# EAGLE board MZMFC v8 (EAGLE 9.7.0), part 1 of 2
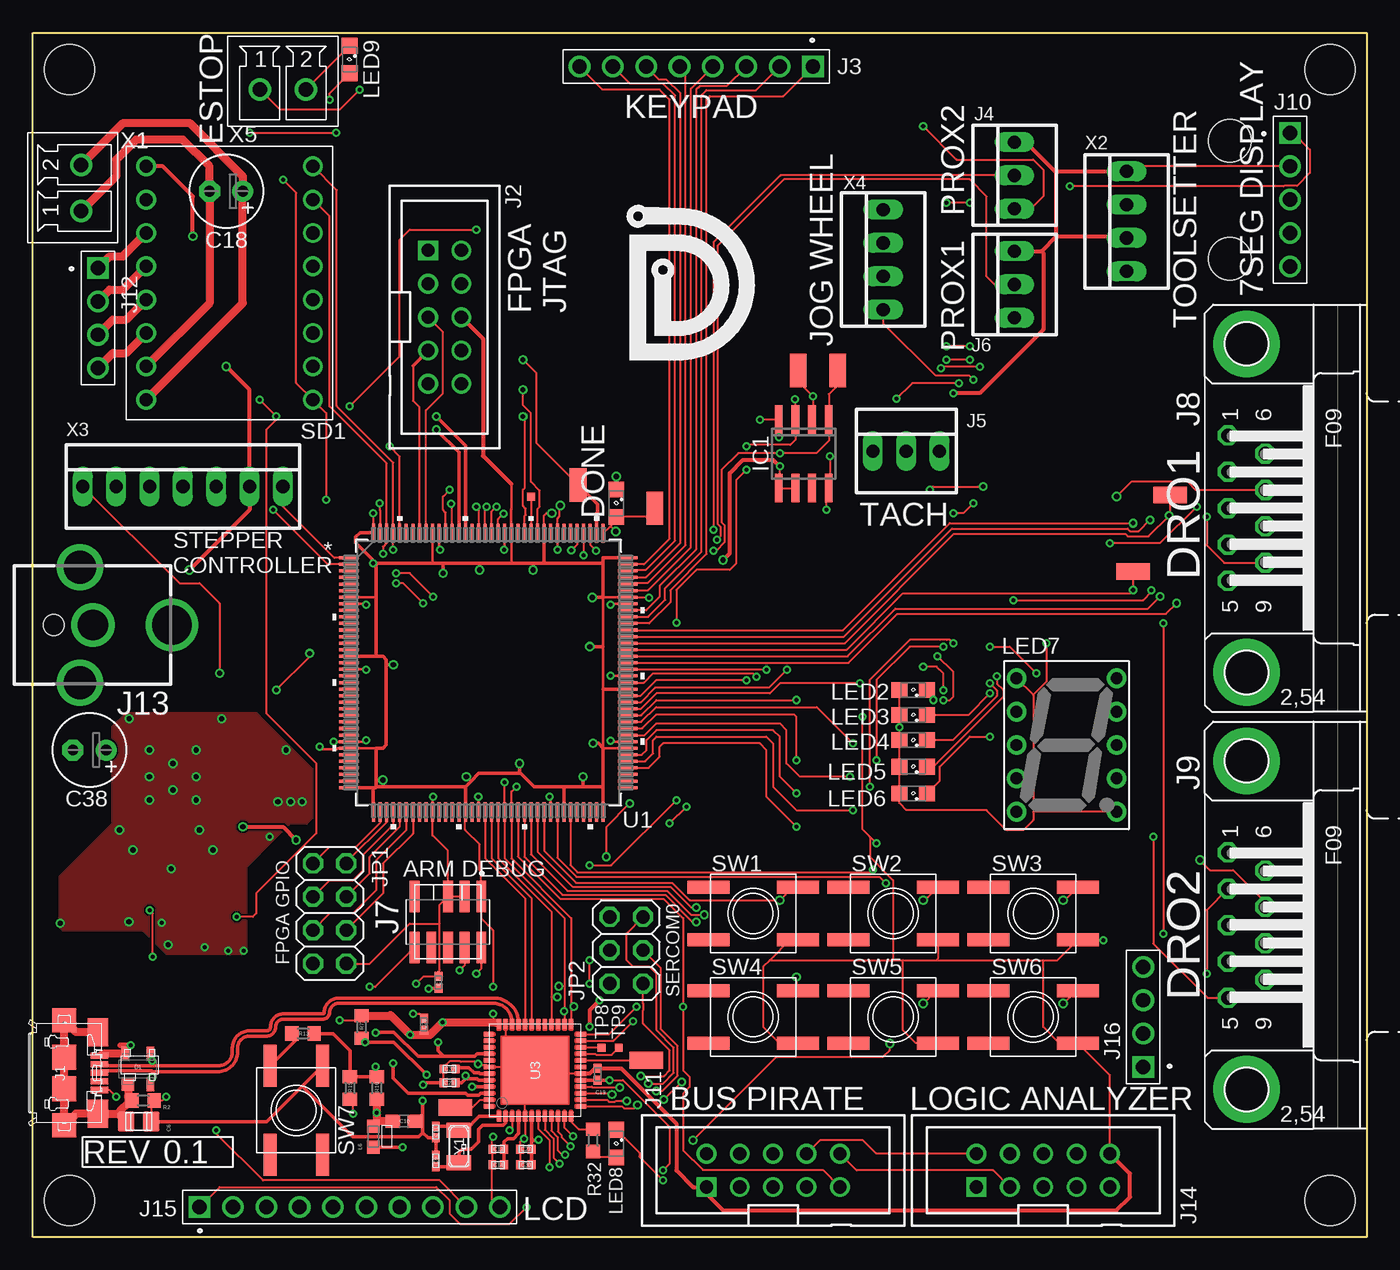
[diagram p0: board, top side]
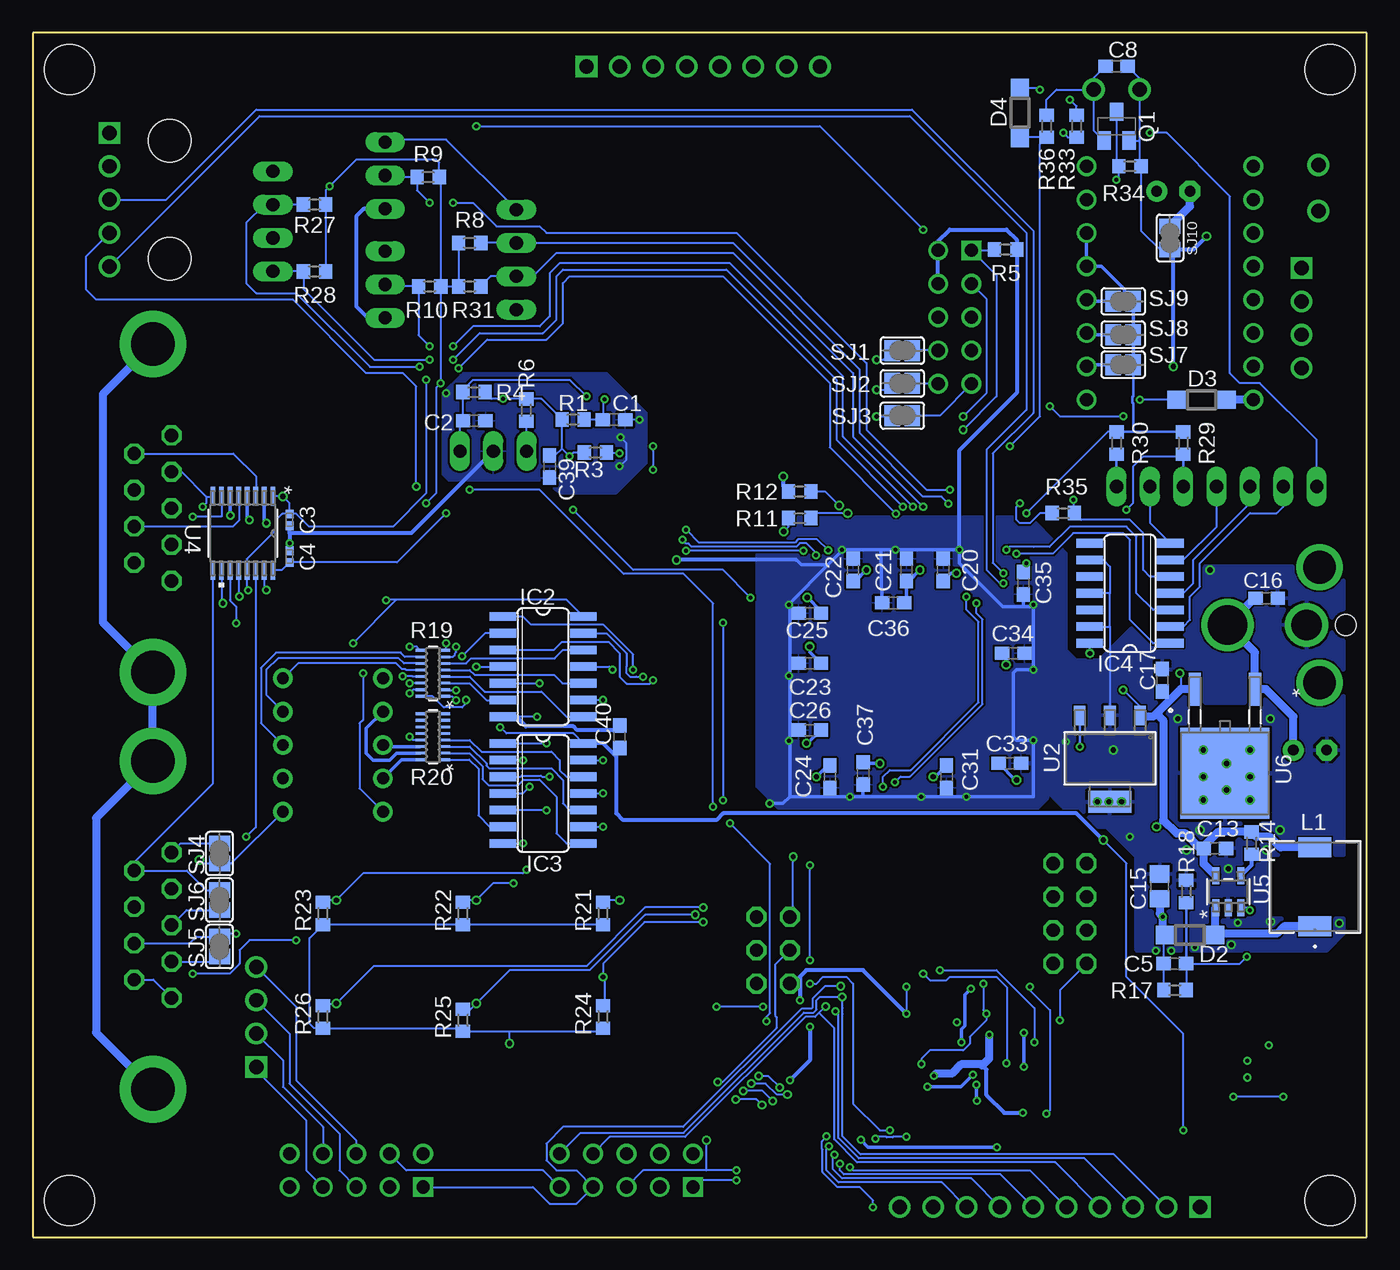
[diagram p1: board, bottom side, seen from below]

Size 101.6 x 91.69 mm. Coordinates in mm from the lower left corner, seen from the top.
Outline: 0,0 0,91.69 101.6,91.69 101.6,0 0,0
Copper layers (1*16): Top 0.035mm / dielectric 1.5mm / Bottom 0.035mm
Design rules "SeeedStudio_2layers *": minimum track width 6mil, minimum drill 12mil, track to track 6mil, track to pad 6mil, pad to pad 6mil, via to via 6mil, smd to smd 0mil, copper to edge 10mil, drill to drill 10mil, minimum pad ring 10mil, minimum via ring 6mil, stop-mask expansion 2mil, vias tented up to drill 100mil, thermal gap 8mil
Net classes: 0 default: width 0.152 mm, drill 0.25 mm
Holes 3.81 mm at 2.79,2.79 98.81,2.79 2.79,88.9 98.81,88.9
Holes 3.25 mm at 91.19,83.49 91.19,74.5
tRestrict: 1 lines

## Footprints (pad centres in the part's own frame; a part is rotated, then mirrored left to right if it is on the bottom)
C0603 = smd 1.1 x 1: 1 -0.85,0; 2 0.85,0
0402-1005X55N = smd 0.62 x 0.62: 1 -0.45,0; 2 0.45,0
C0805 = smd 1.5 x 1.25: 1 0,0.95; 2 0,-0.95
C0805' = smd 1.3 x 1.5: 1 -0.95,0; 2 0.95,0
E2,5-6 = drill 0.813 pad 1.6: + -1.27,0 | drill 0.813 pad 1.6 octagon: - 1.27,0
SOT190P230X110-4N = smd 1 x 1: 1 -1.15,0.75 | smd 1 x 0.6: 2 -1.15,-0.95; 3 1.15,-0.95; 4 1.15,0.95
SOD123 = smd 1.4 x 1.4: A 1.9,0; C -1.9,0
SO08 = smd 0.6 x 2.2: 1 -1.905,-2.6; 2 -0.635,-2.6; 3 0.635,-2.6; 4 1.905,-2.6; 5 1.905,2.6; 6 0.635,2.6; 7 -0.635,2.6; 8 -1.905,2.6
SO14 = smd 0.66 x 2.032: 1 -3.81,-3.073; 2 -2.54,-3.073; 3 -1.27,-3.073; 4 0,-3.073; 5 1.27,-3.073; 6 2.54,-3.073; 7 3.81,-3.073; 8 3.81,3.073; 9 2.54,3.073; 10 1.27,3.073; 11 0,3.073; 12 -1.27,3.073; 13 -2.54,3.073; 14 -3.81,3.073
USBMICRO-ZX62-AB-5PA = smd 0.4 x 1.35: 1 -1.3,3.025; 2 -0.65,3.025; 3 0,3.025; 4 0.65,3.025; 5 1.3,3.025 | smd 2.1 x 1.6: 6 3.1,2.9; 11 -3.1,2.9 | smd 1.8 x 1.9: 7 4,0.35; 10 -4,0.35 | smd 1.9 x 1.9: 8 1.2,0.35; 9 -1.2,0.35
PAK100/2500-10 = drill 1 pad 1.422 square: 1 -5.08,-1.27 | drill 1 pad 1.422: 2 -5.08,1.27; 3 -2.54,-1.27; 4 -2.54,1.27; 5 0,-1.27; 6 0,1.27; 7 2.54,-1.27; 8 2.54,1.27; 9 5.08,-1.27; 10 5.08,1.27
61300811121 = drill 1.1 square: 1 -8.89,0 | drill 1.1: 2 -6.35,0; 3 -3.81,0; 4 -1.27,0; 5 1.27,0; 6 3.81,0; 7 6.35,0; 8 8.89,0
22-23-2031 = drill 1 long: 1 -2.54,0; 2 0,0; 3 2.54,0
FTSH-105-01-F-DV-007-K = smd 0.75 x 2.4: 1 -2.54,-1.95; 2 -2.54,1.95; 3 -1.27,-1.95; 4 -1.27,1.95; 5 0,-1.95; 6 0,1.95; 8 1.27,1.95; 9 2.54,-1.95; 10 2.54,1.95
F09HP = drill 1.016 octagon: 1 -5.54,-1.42; 2 -2.77,-1.42; 3 0,-1.42; 4 2.77,-1.42; 5 5.54,-1.42; 6 -4.155,1.42; 7 -1.385,1.42; 8 1.385,1.42; 9 4.155,1.42 | drill 3.302 pad 5.08: G1 -12.495,0; G2 12.495,0
61300511121 = drill 1.1 square: 1 -5.08,0 | drill 1.1: 2 -2.54,0; 3 0,0; 4 2.54,0; 5 5.08,0
61300411121 = drill 1.1 square: 1 -3.81,0 | drill 1.1: 2 -1.27,0; 3 1.27,0; 4 3.81,0
PJ-063AH = drill 3: + 0,-5 | drill 2.3: - 0,1 | drill 2.5: P$2 -4.4,2; P$3 4.4,2 | hole 1.6: 0,4
61301011121 = drill 1.1 square: 1 -11.43,0 | drill 1.1: 2 -8.89,0; 3 -6.35,0; 4 -3.81,0; 5 -1.27,0; 6 1.27,0; 7 3.81,0; 8 6.35,0; 9 8.89,0; 10 11.43,0
2X04 = drill 1.016 octagon: 1 -3.81,-1.27; 2 -3.81,1.27; 3 -1.27,-1.27; 4 -1.27,1.27; 5 1.27,-1.27; 6 1.27,1.27; 7 3.81,-1.27; 8 3.81,1.27
2X03 = drill 1.016 octagon: 1 -2.54,-1.27; 2 -2.54,1.27; 3 0,-1.27; 4 0,1.27; 5 2.54,-1.27; 6 2.54,1.27
IND_BOURNS_SRR0604 = smd 1.524 x 2.515: 1 -3.01,0; 2 3.01,0
0603-1608X90N = smd 0.95 x 1: 1 -0.8,0; 2 0.8,0
SML0805 = smd 1.2 x 1.2: A 1.05,0; C -1.05,0
LA-401 = drill 0.9 pad 1.5: 1 -3.81,5.08; 2 -3.81,2.54; 3 -3.81,0; 4 -3.81,-2.54; 5 -3.81,-5.08; 6 3.81,-5.08; 7 3.81,-2.54; 8 3.81,0; 9 3.81,2.54; 10 3.81,5.08
SOT23-BEC = smd 1 x 1.4: B -0.95,-1.1; C 0,1.1; E 0.95,-1.1
R0603 = smd 1 x 1.1: 1 -0.85,0; 2 0.85,0
EXB2HV = smd 0.686 x 0.203: 1 -0.965,1.75; 2 -0.965,1.25; 3 -0.965,0.75; 4 -0.965,0.25; 5 -0.965,-0.25; 6 -0.965,-0.75; 7 -0.965,-1.25; 8 -0.965,-1.75; 9 0.965,-1.75; 10 0.965,-1.25; 11 0.965,-0.75; 12 0.965,-0.25; 13 0.965,0.25; 14 0.965,0.75; 15 0.965,1.25; 16 0.965,1.75
STEPPER_DRIVER = drill 1: P0 -6.35,8.89; P1 -6.35,6.35; P2 -6.35,3.81; P3 -6.35,1.27; P4 -6.35,-1.27; P5 -6.35,-3.81; P6 -6.35,-6.35; P7 -6.35,-8.89; P8 6.35,-8.89; P9 6.35,-6.35; P10 6.35,-3.81; P11 6.35,-1.27; P12 6.35,1.27; P13 6.35,3.81; P14 6.35,6.35; P15 6.35,8.89
SJ = smd 1.168 x 1.6: 1 -0.762,0; 2 0.762,0
SJ_DEFAULT = smd 1.168 x 1.6: 1 -0.889,0; 2 0.889,0
EVQQ2* = smd 3.2 x 1: A -3.4,-2; A' 3.4,-2; B -3.4,2; B' 3.4,2
TESTPOINT_RCT_0805 = smd 2.54 x 1.27: P$1 0,0
TP06SQ = smd 0.6 x 0.6: TP 0,0
TQFP144 = smd 1.473 x 0.229: 1 -10.617,8.75; 2 -10.617,8.25; 3 -10.617,7.75; 4 -10.617,7.25; 5 -10.617,6.75; 6 -10.617,6.25; 7 -10.617,5.75; 8 -10.617,5.25; 9 -10.617,4.75; 10 -10.617,4.25; 11 -10.617,3.75; 12 -10.617,3.25; 13 -10.617,2.75; 14 -10.617,2.25; 15 -10.617,1.75; 16 -10.617,1.25; 17 -10.617,0.75; 18 -10.617,0.25; 19 -10.617,-0.25; 20 -10.617,-0.75; 21 -10.617,-1.25; 22 -10.617,-1.75; 23 -10.617,-2.25; 24 -10.617,-2.75; 25 -10.617,-3.25; 26 -10.617,-3.75; 27 -10.617,-4.25; 28 -10.617,-4.75; 29 -10.617,-5.25; 30 -10.617,-5.75; 31 -10.617,-6.25; 32 -10.617,-6.75; 33 -10.617,-7.25; 34 -10.617,-7.75; 35 -10.617,-8.25; 36 -10.617,-8.75; 73 10.617,-8.75; 74 10.617,-8.25; 75 10.617,-7.75; 76 10.617,-7.25; 77 10.617,-6.75; 78 10.617,-6.25; 79 10.617,-5.75; 80 10.617,-5.25; 81 10.617,-4.75; 82 10.617,-4.25; 83 10.617,-3.75; 84 10.617,-3.25; 85 10.617,-2.75; 86 10.617,-2.25; 87 10.617,-1.75; 88 10.617,-1.25; 89 10.617,-0.75; 90 10.617,-0.25; 91 10.617,0.25; 92 10.617,0.75; 93 10.617,1.25; 94 10.617,1.75; 95 10.617,2.25; 96 10.617,2.75; 97 10.617,3.25; 98 10.617,3.75; 99 10.617,4.25; 100 10.617,4.75; 101 10.617,5.25; 102 10.617,5.75; 103 10.617,6.25; 104 10.617,6.75; 105 10.617,7.25; 106 10.617,7.75; 107 10.617,8.25; 108 10.617,8.75 | smd 0.229 x 1.473: 37 -8.75,-10.617; 38 -8.25,-10.617; 39 -7.75,-10.617; 40 -7.25,-10.617; 41 -6.75,-10.617; 42 -6.25,-10.617; 43 -5.75,-10.617; 44 -5.25,-10.617; 45 -4.75,-10.617; 46 -4.25,-10.617; 47 -3.75,-10.617; 48 -3.25,-10.617; 49 -2.75,-10.617; 50 -2.25,-10.617; 51 -1.75,-10.617; 52 -1.25,-10.617; 53 -0.75,-10.617; 54 -0.25,-10.617; 55 0.25,-10.617; 56 0.75,-10.617; 57 1.25,-10.617; 58 1.75,-10.617; 59 2.25,-10.617; 60 2.75,-10.617; 61 3.25,-10.617; 62 3.75,-10.617; 63 4.25,-10.617; 64 4.75,-10.617; 65 5.25,-10.617; 66 5.75,-10.617; 67 6.25,-10.617; 68 6.75,-10.617; 69 7.25,-10.617; 70 7.75,-10.617; 71 8.25,-10.617; 72 8.75,-10.617; 109 8.75,10.617; 110 8.25,10.617; 111 7.75,10.617; 112 7.25,10.617; 113 6.75,10.617; 114 6.25,10.617; 115 5.75,10.617; 116 5.25,10.617; 117 4.75,10.617; 118 4.25,10.617; 119 3.75,10.617; 120 3.25,10.617; 121 2.75,10.617; 122 2.25,10.617; 123 1.75,10.617; 124 1.25,10.617; 125 0.75,10.617; 126 0.25,10.617; 127 -0.25,10.617; 128 -0.75,10.617; 129 -1.25,10.617; 130 -1.75,10.617; 131 -2.25,10.617; 132 -2.75,10.617; 133 -3.25,10.617; 134 -3.75,10.617; 135 -4.25,10.617; 136 -4.75,10.617; 137 -5.25,10.617; 138 -5.75,10.617; 139 -6.25,10.617; 140 -6.75,10.617; 141 -7.25,10.617; 142 -7.75,10.617; 143 -8.25,10.617; 144 -8.75,10.617
SOT-223_3MC = smd 0.889 x 1.473: 1 -2.3,-3.269; 2 0,-3.269; 3 2.3,-3.269 | smd 3.302 x 1.676: 4 0,3.302
QFN50P700X700X90-49XN-EPSQ515 = smd 0.65 x 0.28: 1 -3.525,2.75; 2 -3.525,2.25; 3 -3.525,1.75; 4 -3.525,1.25; 5 -3.525,0.75; 6 -3.525,0.25; 7 -3.525,-0.25; 8 -3.525,-0.75; 9 -3.525,-1.25; 10 -3.525,-1.75; 11 -3.525,-2.25; 12 -3.525,-2.75; 25 3.525,-2.75; 26 3.525,-2.25; 27 3.525,-1.75; 28 3.525,-1.25; 29 3.525,-0.75; 30 3.525,-0.25; 31 3.525,0.25; 32 3.525,0.75; 33 3.525,1.25; 34 3.525,1.75; 35 3.525,2.25; 36 3.525,2.75 | smd 0.28 x 0.65: 13 -2.75,-3.525; 14 -2.25,-3.525; 15 -1.75,-3.525; 16 -1.25,-3.525; 17 -0.75,-3.525; 18 -0.25,-3.525; 19 0.25,-3.525; 20 0.75,-3.525; 21 1.25,-3.525; 22 1.75,-3.525; 23 2.25,-3.525; 24 2.75,-3.525; 37 2.75,3.525; 38 2.25,3.525; 39 1.75,3.525; 40 1.25,3.525; 41 0.75,3.525; 42 0.25,3.525; 43 -0.25,3.525; 44 -0.75,3.525; 45 -1.25,3.525; 46 -1.75,3.525; 47 -2.25,3.525; 48 -2.75,3.525 | smd 5 x 5: 49 0,0
TSSOP-16 = smd 1.473 x 0.356: 1 -2.819,2.275; 2 -2.819,1.625; 3 -2.819,0.975; 4 -2.819,0.325; 5 -2.819,-0.325; 6 -2.819,-0.975; 7 -2.819,-1.625; 8 -2.819,-2.275; 9 2.819,-2.275; 10 2.819,-1.625; 11 2.819,-0.975; 12 2.819,-0.325; 13 2.819,0.325; 14 2.819,0.975; 15 2.819,1.625; 16 2.819,2.275
MF05A = smd 1.27 x 0.559: 1 -1.219,0.953; 2 -1.219,0; 3 -1.219,-0.953; 4 1.219,-0.953; 5 1.219,0.953
DPAK-3 = smd 0.94 x 2.489: 1 -2.29,-6.413; 3 2.29,-6.413 | smd 6.782 x 6.934: 2 0,0
HDR_TERMBLK_3.5_2 = drill 1.1 pad 1.7: 1 -1.75,0; 2 1.75,0
22-23-2041 = drill 1 long: 1 -3.81,0; 2 -1.27,0; 3 1.27,0; 4 3.81,0
22-23-2071 = drill 1 long: 1 -7.62,0; 2 -5.08,0; 3 -2.54,0; 4 0,0; 5 2.54,0; 6 5.08,0; 7 7.62,0
QUARZO-ABS07 = smd 1.1 x 1.9: 1 -1.25,0; 2 1.25,0

## Placement (x,y rotation side)
C1  0.1u  [C0603]  57.33,62.24 0 bottom
C2  0.1u  [C0603]  67.98,62.15 0 bottom
C3  100nF  [0402-1005X55N]  82.04,54.61 270 bottom
C4  100nF  [0402-1005X55N]  82.04,51.82 90 bottom
C5  220p  [C0603]  14.61,20.83 180 bottom
C6  4.7nF  [C0805]  8.06,8.8 90 top
C7  100nF  [0402-1005X55N]  30.9,19.4 90 top
C8  0.1u  [C0603]  19.05,89.15 0 bottom
C9  20pF  [0402-1005X55N]  30.7,5.8 270 top
C10  1uF  [C0603]  28.26,8.83 0 top
C11  20pF  [0402-1005X55N]  30.7,8 90 top
C12  4.7uF  [0402-1005X55N]  35.45,6.7 180 top
C13  2.2u  [C0603]  11.56,29.59 0 bottom
C14  100nF  [0402-1005X55N]  35.45,5.5 180 top
C15  4.7u  [C0805']  15.77,26.7 270 bottom
C16  1uF  [C0603]  7.62,48.64 0 bottom
C17  1uF  [C0603]  15.57,42.39 90 bottom
C18  100u  [E2,5-6]  14.73,79.63 180 top
C19  100nF  [0402-1005X55N]  43.03,12.4 90 top
C20  0.1u  [C0603]  32.26,50.8 90 bottom
C21  0.01u  [C0603]  35.05,50.8 90 bottom
C22  0.1u  [C0603]  39.12,50.8 90 bottom
C23  0.1u  [C0603]  42.42,43.69 180 bottom
C24  0.1u  [C0603]  40.89,35.05 270 bottom
C25  0.01u  [C0603]  42.42,47.5 180 bottom
C26  0.01u  [C0603]  42.42,38.61 180 bottom
C27  4.7uF  [0402-1005X55N]  37.55,6.7 180 top
C28  100nF  [0402-1005X55N]  31.75,11.75 180 top
C29  100nF  [0402-1005X55N]  29.8,16.2 90 top
C30  100nF  [0402-1005X55N]  37.55,5.5 180 top
C31  0.01u  [C0603]  32,35.05 270 bottom
C32  1uF  [0402-1005X55N]  31.75,12.8 180 top
C33  0.1u  [C0603]  27.18,36.07 0 bottom
C34  0.01u  [C0603]  26.92,44.45 0 bottom
C35  0.1u  [C0603]  26.16,49.78 270 bottom
C36  10u  [C0603]  36.07,48.29 180 bottom
C37  1u  [C0603]  38.35,35.31 270 bottom
C38  100u  [E2,5-6]  4.32,37.08 180 top
C39  0.1u  [C0603]  62.23,58.67 270 bottom
C40  0.1u  [C0603]  56.9,38.1 90 bottom
D1  PRTR5V0U2X,215  [SOT190P230X110-4N]  8,12.8 90 top
D2  1N5819HW  [SOD123]  13.46,22.99 0 bottom
D3  1N5819HW  [SOD123]  12.57,63.75 0 bottom
D4  MMSZ5225B-7-F  [SOD123]  26.42,85.6 90 bottom
FRAME1  [REVISION]  9.65,5.33 0 top
IC1  LM393D  [SO08]  58.72,59.63 180 top
IC2  74LS06D  [SO14]  62.74,43.43 270 bottom
IC3  74LS06D  [SO14]  62.74,33.78 270 bottom
IC4  74LS06D  [SO14]  18.03,49.02 90 bottom
J1  ZX62-AB-5PA(31)  [USBMICRO-ZX62-AB-5PA]  2.05,12.5 270 top
J2  302-S101  [PAK100/2500-10]  31.37,70.05 270 top
J3  61300811121  [61300811121]  50.53,89.12 180 top
J4  22-23-2031  [22-23-2031]  74.77,80.83 90 top
J5  22-23-2031  [22-23-2031]  66.53,59.85 0 top
J6  22-23-2031  [22-23-2031]  74.77,72.53 90 top
J7  FTSH-105-01-F-DV-007-K  [FTSH-105-01-F-DV-007-K]  31.62,24 180 top
J8  DB9F_RA  [F09HP]  92.46,55.5 270 top
J9  DB9F_RA  [F09HP]  92.46,23.75 270 top
J10  61300511121  [61300511121]  95.76,78.99 270 top
J11  302-S101  [PAK100/2500-10]  56.39,5.08 0 top
J12  61300411121  [61300411121]  4.95,69.98 270 top
J13  PJ-063AH  [PJ-063AH]  5.59,46.61 90 top
J14  302-S101  [PAK100/2500-10]  76.96,5.08 0 top
J15  61301011121  [61301011121]  24.13,2.29 0 top
J16  61300411121  [61300411121]  84.58,16.76 90 top
JP1  [2X04]  22.61,24.64 270 top
JP2  [2X03]  45.21,21.84 90 top
L1  SRR0604-100ML  [IND_BOURNS_SRR0604]  3.94,26.67 90 bottom
L6  BLM18PG471SN1D  [0603-1608X90N]  25.93,7.64 270 top
LED1  [SML0805]  44.45,55.88 270 top
LED2  [SML0805]  67.06,41.66 180 top
LED3  [SML0805]  67.06,39.75 180 top
LED4  [SML0805]  67.06,37.85 180 top
LED5  [SML0805]  67.06,35.81 180 top
LED6  [SML0805]  67.06,33.78 180 top
LED7  LA-401AD  [LA-401]  78.74,37.47 0 top
LED8  [SML0805]  44.45,7.11 270 top
LED9  [SML0805]  24.13,89.66 270 top
Q1  *3904  [SOT23-BEC]  19.05,84.58 0 bottom
R1  10k  [R0603]  60.45,62.25 180 bottom
R2  1M  [R0603]  8.41,10.4 180 top
R3  10k  [R0603]  58.75,59.73 180 bottom
R4  10k  [R0603]  68,64.33 0 bottom
R5  4.7k  [R0603]  27.51,75.19 180 bottom
R6  470  [R0603]  64.02,62.97 90 bottom
R7  1K  [R0603]  25.05,16 90 top
R8  4.7k  [R0603]  68.33,75.69 0 bottom
R9  10k  [R0603]  71.49,80.71 0 bottom
R10  10k  [R0603]  71.37,72.39 0 bottom
R11  330  [R0603]  43.18,54.74 0 bottom
R12  330  [R0603]  43.18,56.77 180 bottom
R13  330R  [R0603]  20.58,15.5 0 top
R14  51k  [R0603]  8.76,30 90 bottom
R15  39R  [R0603]  24.16,11.35 90 top
R16  10K  [R0603]  26.2,11.35 270 top
R17  117k  [R0603]  14.61,18.8 180 bottom
R18  13.3k  [R0603]  13.74,26.31 90 bottom
R19  EXB-2HV221JV  [EXB2HV]  71.12,42.93 180 bottom
R20  EXB-2HV221JV  [EXB2HV]  71.12,38.1 180 bottom
R21  10k  [R0603]  58.17,24.64 90 bottom
R22  10k  [R0603]  68.83,24.64 90 bottom
R23  10k  [R0603]  79.5,24.64 90 bottom
R24  10k  [R0603]  58.17,16.76 90 bottom
R25  10k  [R0603]  68.83,16.51 90 bottom
R26  10k  [R0603]  79.5,16.76 90 bottom
R27  1k  [R0603]  80.14,78.61 0 bottom
R28  150  [R0603]  80.14,73.53 0 bottom
R29  4.7k  [R0603]  13.97,60.45 90 bottom
R30  4.7k  [R0603]  19.05,60.45 90 bottom
R31  4.7k  [R0603]  68.33,72.39 0 bottom
R32  470  [R0603]  42.67,7.37 270 top
R33  470  [R0603]  22.1,84.58 270 bottom
R34  10k  [R0603]  18.03,81.53 180 bottom
R35  470  [R0603]  23.11,55.12 0 bottom
R36  10k  [R0603]  24.38,84.58 90 bottom
SD1  [STEPPER_DRIVER]  14.99,72.64 180 top
SJ1  [SJ]  35.37,67.5 180 bottom
SJ2  [SJ]  35.37,65 180 bottom
SJ3  [SJ]  35.37,62.55 0 bottom
SJ4  [SJ]  87.38,29.21 90 bottom
SJ5  [SJ]  87.38,22.12 90 bottom
SJ6  [SJ]  87.38,25.65 90 bottom
SJ7  [SJ]  18.54,66.42 180 bottom
SJ8  [SJ]  18.54,68.71 180 bottom
SJ9  [SJ]  18.54,71.25 180 bottom
SJ10  SJ_DEFAULT  [SJ_DEFAULT]  14.99,76.07 270 bottom
SW1  PB_NO_EVQQ2  [EVQQ2*]  54.86,24.64 0 top
SW2  PB_NO_EVQQ2  [EVQQ2*]  65.53,24.64 0 top
SW3  PB_NO_EVQQ2  [EVQQ2*]  76.2,24.64 0 top
SW4  PB_NO_EVQQ2  [EVQQ2*]  54.86,16.76 0 top
SW5  PB_NO_EVQQ2  [EVQQ2*]  65.53,16.76 0 top
SW6  PB_NO_EVQQ2  [EVQQ2*]  76.2,16.76 0 top
SW7  PB_NO_EVQQ2  [EVQQ2*]  20.07,9.65 90 top
TP1  TESTPOINTRCT_0805  [TESTPOINT_RCT_0805]  61.32,65.99 90 top
TP2  TESTPOINTRCT_0805  [TESTPOINT_RCT_0805]  58.29,65.99 90 top
TP3  TESTPOINTRCT_0805  [TESTPOINT_RCT_0805]  41.53,57.28 90 top
TP4  TESTPOINTRCT_0805  [TESTPOINT_RCT_0805]  47.37,55.5 90 top
TP5  PTR1TP06SQ  [TP06SQ]  37.95,56.36 0 top
TP6  TESTPOINTRCT_0805  [TESTPOINT_RCT_0805]  86.61,56.52 0 top
TP7  TESTPOINTRCT_0805  [TESTPOINT_RCT_0805]  83.82,50.67 0 top
TP8  PTR1TP06SQ  [TP06SQ]  43.31,14.4 0 top
TP9  PTR1TP06SQ  [TP06SQ]  44.63,14.4 0 top
TP10  TESTPOINTRCT_0805  [TESTPOINT_RCT_0805]  32.18,9.86 0 top
TP12  TESTPOINTRCT_0805  [TESTPOINT_RCT_0805]  46.74,13.46 0 top
U1  LCMXO2-4000HC-4TG144C  [TQFP144]  34.7,42.97 0 top
U2  MCP1824ST-3302E/DB  [SOT-223_3MC]  19.56,36.45 180 bottom
U3  ATSAMD21G18A-48  [QFN50P700X700X90-49XN-EPSQ515]  38.25,12.7 90 top
U4  MC14504BDTR2G  [TSSOP-16]  85.6,53.59 270 bottom
U5  LMR62014XMFE/NOPB  [MF05A]  10.54,26.29 90 bottom
U6  MC78M05CDTRKG  [DPAK-3]  10.79,35.31 180 bottom
X1  HDR_TERMBLK_3.5_2  [HDR_TERMBLK_3.5_2]  3.68,79.88 90 top
X2  22-23-2041  [22-23-2041]  83.31,77.34 90 top
X3  22-23-2071  [22-23-2071]  11.43,57.15 0 top
X4  22-23-2041  [22-23-2041]  64.77,74.42 90 top
X5  HDR_TERMBLK_3.5_2  [HDR_TERMBLK_3.5_2]  19.05,87.38 0 top
Y1  32.768KHz  [QUARZO-ABS07]  32.45,6.9 90 top

## Library data of the parts
C1 C2 C8 C18 = rcl; SPICEPREFIX: C
C3 C4 = MK1_Zero; DESCR: CAP CER 0.1UF 50V 10% X5R 0402; MF: TDK; MPN: C1005X5R1H104K050BB
C5 C13 C15 C36-C40 = rcl; ASSY: POWER; SPICEPREFIX: C
C6 = Arduino-rcl; ASSY: MCU; VOLTAGE: 1KV
C7 C14 C19 C28-C30 = MK1_Zero; ASSY: MCU; DESCR: CAP CER 0.1UF 50V 10% X5R 0402; MF: TDK; MPN: C1005X5R1H104K050BB
C9 C11 = MK1_Zero; ASSY: MCU; DESCR: CAP CER 20PF 50V 5% NP0 0402; MF: Kemet; MPN: CBR04C200J5GAC
C10 C16 C17 = rcl; ASSY: POWER; SPICEPREFIX: C; VOLTAGE: 25V
C12 C27 = MK1_Zero; ASSY: MCU; DESCR: CAP CER 4.7UF 6.3V 20% X5R 0402; MF: Murata; MPN: GRM155R60J475ME47D
C20-C26 C31 C33-C35 = rcl; ASSY: FPGA; SPICEPREFIX: C
C32 = MK1_Zero; ASSY: MCU; DESCR: CAP CER 1UF 25V 10% X5R 0402; MF: Murata; MPN: GRM155R61E105KA12D
D1 = MK1_Zero; ASSY: MCU; DESCR: TVS DIODE 5.5VWM SOT143B; MF: NXP; MPN: PRTR5V0U2X,215
D2 = diode; ASSY: POWER
D3 = diode
D4 = diode; WHAT: 3V Zener
FRAME1 = misc; REVISION: 0.1
IC1 = linear; IC1: IC1
IC2-IC4 = 74xx-us
J1 L6 = MK1_Zero; ASSY: MCU
J2 TP3 TP4 = misc; ASSY: FPGA
J3 = Headers; CREATED_BY: PCBLayout.com; DIGI_KEY_PART_NUMBER: 732-5321-ND; MANUFACTURER: Wurth Electronics Inc.; MPN: 61300811121; WHAT: KEYPAD
J4 = con-molex; MF: MOLEX; MPN: 22-23-2031; OC_FARNELL: 1462950; OC_NEWARK: 30C0862; WHAT: PROX2
J5 = con-molex; MF: MOLEX; MPN: 22-23-2031; OC_FARNELL: 1462950; OC_NEWARK: 30C0862; WHAT: TACH
J6 = con-molex; MF: MOLEX; MPN: 22-23-2031; OC_FARNELL: 1462950; OC_NEWARK: 30C0862; WHAT: PROX1
J7 SW7 TP10 TP12 = misc; ASSY: MCU
J8 J9 = misc; DIGIKEY_PN: AE10921-ND; MPN: A-DF 09 A/KG-T2S
J10 = Headers; CREATED_BY: PCBLayout.com; DIGI_KEY_PART_NUMBER: 732-5318-ND; MANUFACTURER: Wurth Electronics Inc.; MPN: 61300511121; WHAT: 7SEG DISPLAY
J11 = misc; ASSY: MCU; WHAT: BUS PIRATE
J12 = Headers; CREATED_BY: PCBLayout.com; DIGI_KEY_PART_NUMBER: 732-5317-ND; MANUFACTURER: Wurth Electronics Inc.; MPN: 61300411121; WHAT: STEPPER
J13 = misc; ASSY: POWER; AVAILABILITY: Unavailable; CUI_PURCHASE_URL: https://www.cuidevices.com/product/interconnect/connectors/dc-power-connectors/jacks/pj-063ah?utm_source=snapeda.com&utm_medium=referral&utm_campaign=snapedaBOM; DESCRIPTION: 2.0 x 6.5 mm, 8.0 A, Horizontal, Through Hole, Shielded, Kinked Pins, Dc Power Jack Connector; MF: CUI Devices; MP: PJ-063AH; PACKAGE: None; PRICE: None
J14 = misc; ASSY: MCU; WHAT: LOGIC ANALYZER
J15 = Headers; CREATED_BY: PCBLayout.com; DIGIKEY_PART_NUMBER: 732-2670-ND; MANUFACTURER: Wurth Electronics Inc.; MPN: 61301011121; WHAT: LCD
J16 = Headers; ASSY: MCU; CREATED_BY: PCBLayout.com; DIGI_KEY_PART_NUMBER: 732-5317-ND; MANUFACTURER: Wurth Electronics Inc.; MPN: 61300411121
JP1 = pinhead; ASSY: FPGA; WHAT: FPGA GPIO
JP2 = pinhead; ASSY: MCU; WHAT: SERCOM0
L1 = misc; ASSY: POWER; MANUFACTURER_PART_NUMBER: SRR0604100ML; VENDOR: Bourns Electronics
LED1 = led; ASSY: FPGA
LED2-LED6 = led
LED7 = led-7-segment; OC_FARNELL: unknown; OC_NEWARK: unknown
LED8 = led; ASSY: MCU
LED9 = led; COLOR: green
Q1 = transistor
R1 R3 R4 R6 R8-R10 R21-R31 R33 R34 R36 = rcl; SPICEPREFIX: R
R2 R7 R13 R15 R16 R32 = rcl; ASSY: MCU; SPICEPREFIX: R
R5 R11 R12 R35 = rcl; ASSY: FPGA; SPICEPREFIX: R
R14 R17 R18 = rcl; ASSY: POWER; SPICEPREFIX: R
R19 R20 = misc; MANUFACTURER_PART_NUMBER: EXB2HV221JV; RVAL: 220; VENDOR: Panasonic
SD1 SJ10 SW1-SW6 TP1 TP2 TP6 TP7 = misc
SJ1-SJ3 = jumper; ASSY: FPGA
SJ4-SJ9 = jumper
TP5 = testpad; ASSY: FPGA
TP8 TP9 = testpad; ASSY: MCU
U1 = misc; ASSY: FPGA; MANUFACTURER_PART_NUMBER: LCMXO24000HC4TG144C; VENDOR: Lattice
U2 = misc; ASSY: POWER; MANUFACTURER_PART_NUMBER: MCP1824ST3302EDB; VENDOR: Microchip
U3 = MK1_Zero; ASSY: MCU; DESCR: IC MCU 32BIT 256KB FLASH 48QFN; MF: Atmel; MPN: ATSAMD21E18A-MU
U4 = misc; MANUFACTURER_PART_NUMBER: MC14504BDTR2G; VENDOR: ON Semiconductor
U5 = misc; ASSY: POWER; MANUFACTURER_PART_NUMBER: LMR62014XMFENOPB; VENDOR: National Semiconductor
U6 = misc; ASSY: POWER; MANUFACTURER_PART_NUMBER: MC78M05CDTRKG; VENDOR: ON Semiconductor
X1 = misc; WHAT: STEPPER POWER
X2 = con-molex; MF: MOLEX; MPN: 22-23-2041; OC_FARNELL: 1462920; OC_NEWARK: 38C0355; WHAT: TOOLSETTER
X3 = con-molex; MF: MOLEX; MPN: 22-23-2071; OC_FARNELL: 1654534; OC_NEWARK: 56H0445; WHAT: STEPPER CONTROLLER
X4 = con-molex; MF: MOLEX; MPN: 22-23-2041; OC_FARNELL: 1462920; OC_NEWARK: 38C0355; WHAT: JOG WHEEL
X5 = misc; WHAT: ESTOP
Y1 = MK1_Zero; ASSY: MCU; DESCR: CRYSTAL 32.768KHZ 12.5PF SMD 3.2x1.5mm; MF: Abracon; MPN: ABS07-32.768KHZ-T

## Nets
7SEG_A: IC2.11 U1.86
7SEG_B: IC2.13 U1.89
7SEG_C: IC3.1 U1.83
7SEG_D: IC3.3 U1.81
7SEG_E: IC3.5 U1.77
7SEG_F: IC3.9 U1.76
7SEG_G: IC3.11 U1.78
+3V3: C4.1 C10.1 C19.1 C20.1 C21.1 C22.1 C23.1 C24.1 C25.1 C26.1 C28.1 C29.1 C31.1 C33.1 C34.1 C35.1 C36.1 C37.1 C39.1 IC1.8 J2.6 J7.1 J10.1 J11.5 JP1.7 JP2.2 L6.1 R1.2 R3.2 R4.2 R6.2 R7.2 R8.1 R9.2 R10.2 R11.2 R16.2 R21.1 R22.1 R23.1 R24.1 R25.1 R26.1 R27.2 R28.2 R29.2 R30.2 R31.1 SD1.P4 SD1.P5 SJ7.1 SJ8.1 SJ9.1 U1.7 U1.16 U1.30 U1.36 U1.37 U1.51 U1.66 U1.72 U1.79 U1.88 U1.102 U1.108 U1.118 U1.123 U1.135 U1.144 U2.3 U3.17 U3.36 U3.44 U4.16
+5V: C3.1 C13.1 C17.1 C40.1 IC2.14 IC3.14 IC4.14 J8.7 J9.7 J15.9 L1.2 LED2.A LED3.A LED4.A LED5.A LED6.A LED7.1 LED7.6 R14.2 R33.2 SJ4.1 U2.1 U4.1 U4.13 U5.5 U6.3 X3.1 X4.1
+12V: C5.2 C15.2 D2.C D3.C J4.1 J6.1 R17.2
+12V_MOT: C18.+ D3.A SD1.P15 X1.2
CS_7SEG: J10.4 U3.23
CS_FPGA: J11.9 J14.4 U1.59 U3.24
CS_LCD: J15.5 U3.7
CS_SD: J15.6 U3.8
DIR: IC4.3 SD1.P7 U1.141
DONE: LED1.A R11.1 TP4.P$1 U1.109
DRO1_A: U1.97 U4.2
DRO1_A_5V: J8.6 U4.3
DRO1_B: U1.96 U4.4
DRO1_B_5V: J8.8 U4.5
DRO1_R: TP6.P$1 U1.95 U4.6
DRO1_R_5V: J8.9 U4.7
DRO2_A: U1.92 U4.10
DRO2_A_5V: J9.6 SJ6.2 U4.9
DRO2_B: U1.93 U4.12
DRO2_B_5V: J9.8 SJ5.2 U4.11
DRO2_R: TP7.P$1 U1.94 U4.15
DRO2_R_5V: J9.5 J9.9 U4.14
ESTOP_3V3: D4.C R36.1 U1.140
FPGA_DATA_AVAILABLE: U1.54 U3.32
FPGA_GPIO1: JP1.1 U1.38
FPGA_GPIO2: JP1.2 U1.39
FPGA_GPIO3: JP1.3 U1.40
FPGA_GPIO4: JP1.4 U1.41
FPGA_GPIO5: JP1.5 U1.42
FPGA_GPIO6: JP1.6 U1.43
FPGA_UC_INTERRUPT: U1.55 U3.31
GND: C1.2 C2.2 C3.2 C4.2 C6.2 C7.2 C8.2 C9.1 C10.2 C11.1 C12.2 C13.2 C14.2 C15.1 C16.2 C17.2 C19.2 C20.2 C21.2 C22.2 C23.2 C24.2 C25.2 C26.2 C27.2 C28.2 C29.2 C30.2 C31.2 C32.2 C33.2 C34.2 C35.2 C36.2 C37.2 C38.- C39.2 C40.2 D4.A IC1.4 IC1.5 IC1.6 IC2.7 IC3.7 IC4.7 IC4.9 IC4.11 IC4.13 J1.5 J2.2 J2.4 J4.3 J5.2 J6.3 J7.3 J7.5 J8.2 J9.2 J10.2 J11.1 J13.- J14.10 J15.10 JP1.8 JP2.6 LED8.C Q1.E R2.1 R5.1 R12.1 R18.2 R34.1 SD1.P8 SJ10.2 SW1.A' SW2.A' SW3.A' SW4.A' SW5.A' SW6.A' SW7.A' U1.8 U1.18 U1.29 U1.46 U1.53 U1.64 U1.80 U1.90 U1.101 U1.116 U1.124 U1.134 U2.2 U2.4 U3.5 U3.18 U3.35 U3.42 U3.49 U4.8 U5.2 U6.2 X2.2 X2.4 X3.6 X4.4 X5.1
GND1: C18.- SD1.P14 SJ10.1 X1.1
INIT: J2.8 SJ1.1
INITN: SJ1.2 TP3.P$1 U1.110
JOG_A: R31.2 U1.128 X4.2
JOG_B: R8.2 U1.132 X4.3
JTAGENB: TP5.TP U1.120
KEYPAD[1]: J3.1 U1.98
KEYPAD[2]: J3.2 U1.99
KEYPAD[3]: J3.3 U1.100
KEYPAD[4]: J3.4 U1.103
KEYPAD[5]: J3.5 U1.104
KEYPAD[6]: J3.6 U1.105
KEYPAD[7]: J3.7 U1.106
KEYPAD[8]: J3.8 U1.107
LCD_BACKLIGHT: J15.1 U3.11
LCD_D/C: J15.7 U3.9
LCD_RESET: J15.8 U3.10
LED2: IC2.1 U1.91
LED3: IC2.3 U1.87
LED4: IC2.5 U1.85
LED5: IC2.9 U1.84
LED6: IC3.13 U1.82
N17650912: D1.4 J1.1
N17852357: C27.1 C30.1 L6.2 U3.6
N17852431: C32.1 U3.43
N$1: C6.1 D1.1 J1.6 J1.7 J1.8 J1.9 J1.10 J1.11 R2.2
N$2: J7.10 R15.1
N$3: J5.1 R6.1
N$4: LED1.C R12.2
N$5: J9.1 SJ4.2
N$6: J9.3 SJ6.1
N$7: J9.4 SJ5.1
N$8: R14.1 U5.4
N$9: SD1.P1 SJ7.2
N$10: D2.A L1.1 U5.1
N$11: C5.1 R17.1 R18.1 U5.3
N$12: J12.1 SD1.P10
N$13: J12.2 SD1.P11
N$14: J12.3 SD1.P12
N$15: J12.4 SD1.P13
N$16: SD1.P2 SJ8.2
N$17: SD1.P3 SJ9.2
N$18: IC2.2 R19.1
N$19: IC2.4 R19.2
N$20: IC2.6 R19.3
N$21: IC2.8 R19.4
N$22: IC2.10 R19.5
N$23: IC2.12 R19.6
N$24: LED7.10 R19.12
N$25: LED7.9 R19.11
N$26: LED7.8 R19.10
N$27: LED7.5 R19.9
N$28: LED5.C R19.13
N$29: LED4.C R19.14
N$30: LED3.C R19.15
N$31: LED2.C R19.16
N$32: IC3.2 R19.7
N$33: IC3.6 R20.1
N$34: IC3.8 R20.2
N$35: IC3.10 R20.3
N$36: IC3.4 R19.8
N$37: IC3.12 R20.4
N$38: LED7.4 R20.16
N$39: LED7.2 R20.15
N$40: LED7.3 R20.14
N$41: LED6.C R20.13
N$42: IC4.2 X3.2
N$43: IC4.4 X3.3
N$44: IC4.6 X3.4
N$45: R13.1 SW7.B'
N$46: J14.6 J16.4
N$47: J14.8 J16.2
N$48: J14.5 J16.3
N$49: J14.7 J16.1
N$50: R32.1 U3.12
N$51: LED8.A R32.2
N$52: TP9.TP U3.21
N$53: TP8.TP U3.22
N$54: TP10.P$1 U3.47
N$55: C8.1 LED9.C Q1.B R36.2 X5.2
N$56: TP12.P$1 U3.20
N$57: R35.1 U1.143
N$58: LED9.A R33.1
PA00_XIN32: C11.2 U3.1 Y1.2
PA01_XOUT32: C9.2 U3.2 Y1.1
PA03_VREFA: C12.1 C14.1 U3.4
PA30_SWCLK: J7.4 R7.1 U3.45
PA31_SWDIO: J7.2 U3.46
PE: J8.G1 J8.G2 J9.G1 J9.G2
PROG: J2.10 SJ2.1
PROGRAMN: SJ2.2 U1.119
PROX1: J6.2 R10.1 U1.112 U1.127
PROX2: J4.2 R9.1 U1.113 U1.133
RESETN: C7.1 R13.2 R15.2 R16.1 U3.40
SERCOM0_CS: JP2.5 U3.15
SERCOM0_MISO: JP2.1 U3.16
SERCOM0_MOSI: JP2.4 U3.13
SERCOM0_SCLK: JP2.3 U3.14
SERCOM1_MISO: J11.10 J14.3 J15.2 U1.56 U3.28
SERCOM1_MOSI: J10.3 J11.8 J14.2 J15.4 U1.58 U3.25
SERCOM1_SCLK: J10.5 J11.7 J14.1 J15.3 U1.57 U3.26
STEP: IC4.1 SD1.P6 U1.142
STEPPER_ALARM: R30.1 U1.1 X3.7
STEPPER_ENABLE: IC4.5 Q1.C R34.2 R35.2 SD1.P0
STEPPER_INPOS: R29.1 U1.2 X3.5
SW1: R21.2 SW1.B' U1.63
SW2: R22.2 SW2.B' U1.65
SW3: R23.2 SW3.B' U1.67
SW4: R24.2 SW4.B' U1.60
SW5: R25.2 SW5.B' U1.61
SW6: R26.2 SW6.B' U1.62
TACH: IC1.1 R3.1 TP1.P$1 U1.111
TACH_SENSOR_IN: C2.1 IC1.2 J5.3 R4.1 TP2.P$1
TCK: J2.1 R5.2 U1.131
TDI: J2.5 U1.136
TDO: J2.7 U1.137
TMS: J2.3 U1.130
TOOLSETTER_MEAS: R28.1 U1.126 X2.1
TOOLSETTER_OVER: R27.1 U1.125 X2.3
TRST: J2.9 SJ3.2
TRST_OPT: SJ3.1 U1.121
USB_N: D1.3 J1.2 U3.33
USB_P: D1.2 J1.3 U3.34
V_TACH_THRESH: C1.1 IC1.3 R1.1 U3.3
VIN: C16.1 C38.+ J13.+ U6.1